# Altium PCB FOS 00_01 Rev 1_6.PcbDoc
Units mm, origin at the board's own origin, x right, y up, seen from the top; angles counter-clockwise.
Board outline 194.8 x 15.3 mm, 2 copper layers (Top Layer, Bottom Layer), stack 1.571 mm thick; 34 components, 28 nets, 97 pads, 17 vias.
Unrouted connection lines stored in the file: 1.
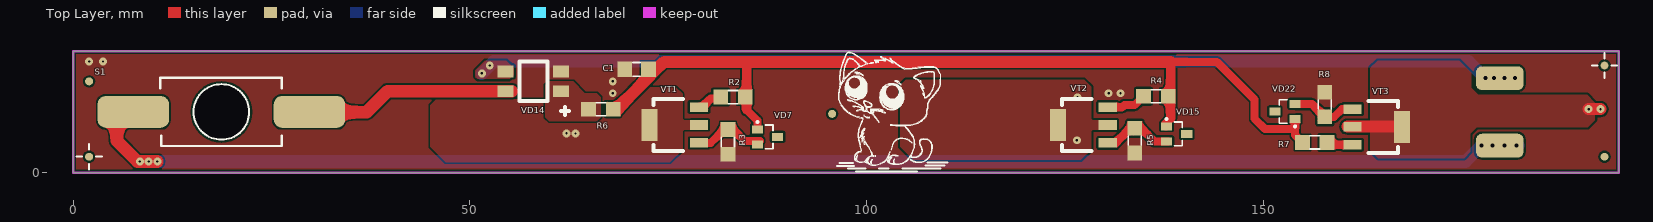
[diagram p0: Top Layer view]
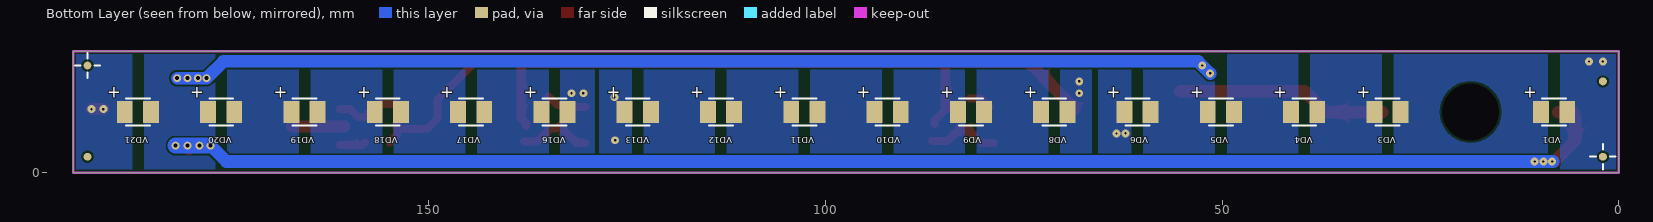
[diagram p1: Bottom Layer view, seen from below]
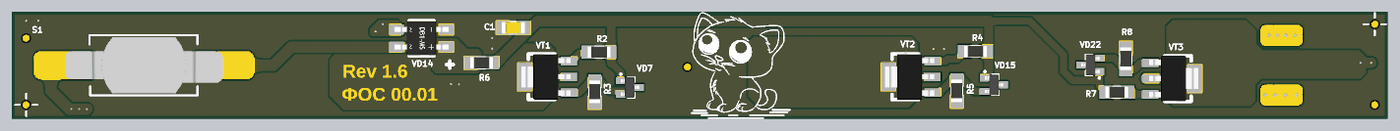
[diagram p2: 3D render of the assembled board from above, using the file's embedded part models]
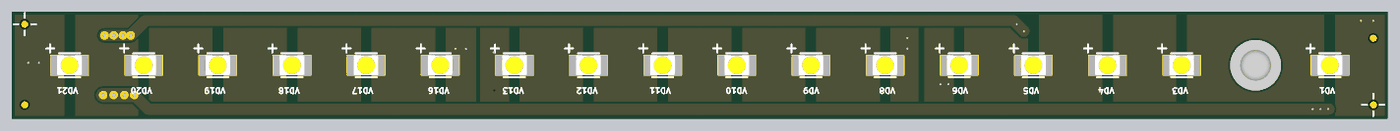
[diagram p3: 3D render of the assembled board from below, using the file's embedded part models]

## Layer stack, top to bottom
Top Solder: solder mask 0.0102, Solder Resist, Dk 3.5
Top Layer: signal copper 0.0356
Dielectric 1: dielectric 1.5, FR-4, Dk 4.8
Bottom Layer: signal copper 0.0356
Bottom Solder: solder mask 0.0102, Solder Resist, Dk 3.5

## Board outline
0,0 194.8,0 194.8,15.3 0,15.3

## Design rules (kind name [scope] priority, off if disabled: settings)
Clearance [All] p1: gap=0.254 ignorepadtopadclearanceinfootprint=FALSE // 0.5
PolygonConnect [All] p1: connectstyle=Direct reliefconductorwidth=0.254 reliefentries=4 polygonreliefangle="90 Angle" airgapwidth=0.254
RoutingVias [All] p1: holewidth=0.711 width=1.27 viastyle="Through Hole" minholewidth=0.711 minwidth=1.27 maxholewidth=0.711 maxwidth=1.27
SolderMaskExpansion [All] p1: expansion=0.102
Width [All] p1: maxlimit=10 minlimit=0.254 preferedwidth=1
30 further rules are at their usual default settings.

## Components (designator, comment, footprint, x,y, rotation, side; value= is the part's Value field where it differs from the comment)
C1 "Capacitor" CAP1206 71,13 r0 top value="1 uF"
R2 "Resistor" RES1206 83.15,9.525 r0 top value="20 Om"
R3 "Resistor" RES1206 82.525,3.875 r90 top value="10 kOm"
R4 "Resistor" RES1206 136.45,9.625 r0 top value="20 Om"
R5 "Resistor" RES1206 133.8,4.025 r90 top value="10 kOm"
R6 "Resistor" RES1206 66.5,8 r180 top value="33 Om"
R7 "Resistor" RES1206 156.475,3.8 r180 top value="20 Om"
R8 "Resistor" RES1206 157.75,8.575 r270 top value="10 kOm"
S1 "button" BUTTON1_2 18.675,7.65 r180 top
VD1 "LED" LED_SAKURA 8.15,7.65 r180 bottom
VD3 "LED" LED_SAKURA 29.15,7.65 r180 bottom
VD4 "LED" LED_SAKURA 39.65,7.65 r180 bottom
VD5 "LED" LED_SAKURA 50.15,7.65 r180 bottom
VD6 "LED" LED_SAKURA 60.65,7.65 r180 bottom
VD7 "BAV23S" "SOT 23" 87.5,4.5 r0 top
VD8 "LED" LED_SAKURA 71.15,7.65 r180 bottom
VD9 "LED" LED_SAKURA 81.65,7.65 r180 bottom
VD10 "LED" LED_SAKURA 92.15,7.65 r180 bottom
VD11 "LED" LED_SAKURA 102.65,7.65 r180 bottom
VD12 "LED" LED_SAKURA 113.15,7.65 r180 bottom
VD13 "LED" LED_SAKURA 123.65,7.65 r180 bottom
VD14 "Diode Bridge" DB-1MS 58,11.5 r270 top value=B1S
VD15 "BAV23S" "SOT 23" 139.075,4.875 r0 top
VD16 "LED" LED_SAKURA 134.15,7.65 r180 bottom
VD17 "LED" LED_SAKURA 144.65,7.65 r180 bottom
VD18 "LED" LED_SAKURA 155.15,7.65 r180 bottom
VD19 "LED" LED_SAKURA 165.65,7.65 r180 bottom
VD20 "LED" LED_SAKURA 176.15,7.65 r180 bottom
VD21 "LED" LED_SAKURA 186.65,7.65 r180 bottom
VD22 "BAV23S" "SOT 23" 152.725,7.7 r180 top
VT1 "PNP" SOT223 75.625,6 r90 top value=BCP53
VT2 "PNP" SOT223 127.125,6 r90 top value=BCP53
VT3 "PNP" SOT223 164.5,5.75 r270 top value=BCP53
? "Comment" cat 102.625,8.9 r0 top

## Footprints (in the part's own frame and the unit in brackets; to place one, negate y for a bottom-side part, rotate by r counter-clockwise, add the part's x,y. Pads: shape width x height; smd on the part's side, far side on the other; paste and mask are expansions set on the pad)
BUTTON1_2 [mm]
  round 0 hole 7.2: 0(0,0)
  rrect50% 9x4 smd paste-4: 1(-11.1,0) 2(11.1,0)
  silkscreen extent -7.6,-4.3 7.7,4.3, body extent -11.2,-4 11.2,4, height 4
CAP1206 [mm]
  rect 1.85x1.95 smd: 1(-1.5,0) 2(1.5,0)
  silkscreen extent -0.45,-0.87 0.45,0.87, body extent -1.65,-0.85 1.65,0.85, height 1.5
cat [mm]
  silkscreen extent -6.36,-8.78 7.55,6.25
DB-1MS [mm]
  rect 1.5x2 smd: 1(1.25,3.5) 2(-1.25,3.5) 3(-1.25,-3.5) 4(1.25,-3.5)
  silkscreen extent -2.5,-1.75 4.25,4.5, body extent -2.45,-3.8 2.45,3.8, height 2.9
LED_SAKURA [mm]
  rect 2x2.8 smd: 1(1.651,0) 2(-1.651,0)
  silkscreen extent -1.5,-1.7 1.5,1.7, body extent -1.78,-1.4 1.78,1.4, height 0.7
RES1206 [mm] "Chip Resistor, 2-Leads, Body 3,20x1,60mm, IPC Medium Density"
  rect 1.85x1.85 smd: 1(-1.55,0) 2(1.55,0)
  silkscreen extent -0.6,-0.82 0.6,0.82, body extent -1.6,-0.8 1.6,0.8, height 0.6
SOT223 [mm]
  rect 1.2x2.3 smd: 1(-2.25,-3.25) 2(0,-3.25) 3(2.25,-3.25)
  rect 4x2 smd: 4(0,3)
  silkscreen extent -3.25,-1.25 3.25,2.5, body extent -3.25,-3.48 3.25,3.48, height 1.7
"SOT 23" [mm] "SOT23, 3-Leads, Body 2,90x2,45mm, Pitch 0,95mm, IPC Medium Density"
  rect 1.4x1 smd: 1(-1.275,0.95) 2(-1.275,-0.95) 3(1.275,0)
  silkscreen extent -1.4,-1.5 0.7,2, body extent -1.3,-1.5 1.3,1.5, height 1.1

## Free pads (board coordinates)
  rrect50% 6x3 smd paste-3: 1(179.8,3.4)
  rrect50% 6x3 smd paste-3 mask+0.102: 1(179.8,11.9)
  round 1 smd paste-3 mask+0.2: 2(2,2) 2(2,11.5) 2(95.65,7.4) 2(193,2) 2(193,13.5)
  round 1 smd far side paste-3 mask+0.2: 2(2,2) 2(2,11.5) 2(193,2) 2(193,13.5)
  round 1 hole 0.5: 3(177.5,3.4) 3(178,11.9) 3(178.9,3.4) 3(179.1,11.9) 3(180.4,3.4) 3(180.4,11.9) 3(181.7,11.9) 3(181.9,3.4)

## Via types
v1: diameter 1, hole 0.3, Top Layer to Bottom Layer, tented both sides, 17 vias

## Nets (pads, with @x,y where several pads share a name; then routed paths per layer and width w, separated by ;. In a path a pad name is that pad's centre, name@x,y a point inside that pad or via, vN(x,y) a via of type N, cw(c..) or ccw(c..) an arc to the next point about the centre after c; other vN are vias at no path point)
GND: C1.1 R3.1 R5.1 R8.1 VD1.1 VD8.1 VD14.2 VD16.1
  other v1: 68,10 130.5,10 132,10 68,11.5 2,14 3.75,14
NetC1_2: C1.2 R2.2 R4.2 R6.1 R7.2 VD7.1 VD15.1 VD22.1 | length 112.9
  Top Layer w1: 84.875,7.925 86.225,6.575 86.225,6.15 ; VD15.1@137.725,5.825 137.725,6.275 138.325,6.875 ; 138.325,13.95 144.15,13.95 148.9,9.2 148.9,6.8 150.2,5.5 154,5.5 ; VD22.1 154,5.5 ; R7.2 154,4.725 154,5.5
  Top Layer w1.2: 84.875,7.925 84.875,13.9 ; 138.325,6.875 138.325,13.95
  Top Layer w1.5: R6.1@68.5,8 74.45,13.95 138.325,13.95
NetR2_1: R2.1 VT1.3 | length 3
  Top Layer w1: VT1.3@79.275,8.275 80.35,9.35 R2.1@81.825,9.35
NetR3_2: R3.2 VD7.2 VT1.1 | length 9.1
  Top Layer w1: VT1.1@78.75,3.75 VT1.1 80.35,3.75 82.025,5.425 R3.2 83.175,5.425 84.6,4 VD7.2@86.55,4
NetR4_1: R4.1 VT2.3 | length 5.2
  Top Layer w1: VT2.3@130.25,8.25 VT2.3 132.25,8.25 132.5,8.5 133.775,8.5 R4.1
NetR5_2: R5.2 VD15.2 VT2.1 | length 9.4
  Top Layer w1: VT2.1@130.25,3.75 VT2.1 131.35,3.75 133.487,5.887 R5.2 134.625,5.575 136.275,3.925 VD15.2 VD15.2@138,3.925
NetR6_2: R6.2 VD14.1
NetR7_1: R7.1 VT3.3 | length 3.3
  Top Layer w1: R7.1 158.325,3.5 VT3.3
NetR8_2: R8.2 VD22.2 VT3.1 | length 8.3
  Top Layer w1: VD22.2 156.125,8.65 R8.2 158.925,7.025 159.9,8 VT3.1
NetVD1_2: VD1.2 VD3.1
NetVD3_2: VD3.2 VD4.1
NetVD4_2: VD4.2 VD5.1
NetVD5_2: VD5.2 VD6.1
NetVD6_2: VD6.2 VT1.2 VT1.4
  other v1: 63.3,4.925 62.175,4.95
NetVD8_2: VD8.2 VD9.1
NetVD9_2: VD9.2 VD10.1
NetVD10_2: VD10.2 VD11.1
NetVD11_2: VD11.2 VD12.1
NetVD12_2: VD12.2 VD13.1
NetVD13_2: VD13.2 VT2.2 VT2.4
  other v1: 126.5,4.075 126.575,9.5
NetVD16_2: VD16.2 VD17.1
NetVD17_2: VD17.2 VD18.1
NetVD18_2: VD18.2 VD19.1
NetVD19_2: VD19.2 VD20.1
NetVD20_2: VD20.2 VD21.1
NetVD21_2: VD21.2 VT3.2 VT3.4 | length 8.1
  Top Layer w1.5: VT3.2@160.6,5.8 VT3.4@167.2,5.8 ; v1(191,8) v1(192.5,8)
POWER1: pad.1@179.8,11.9 pad.3@178,11.9 pad.3@179.1,11.9 pad.3@180.4,11.9 pad.3@181.7,11.9 VD14.3 | length 131.7
  Bottom Layer w1.6: v1(51.5,12.5) 53.025,14.025 175.875,14.025 178,11.9 179.1,11.9 180.4,11.9 pad.3@181.7,11.9
  other v1: 52.5,13.5
POWER2: pad.1@179.8,3.4 pad.3@177.5,3.4 pad.3@178.9,3.4 pad.3@180.4,3.4 pad.3@181.9,3.4 S1.1 S1.2 VD14.4 | length 214.4
  Top Layer w1.6: S1.2@5.5,7 5.5,4 8.1,1.4 v1(8.4,1.4) v1(9.5,1.4) v1(10.6,1.4) ; S1.2@5.7,7.625 S1.2@7.6,7.625 ; S1.1@29.8,7.625 37,7.625 39.625,10.25 VD14.4 VD14.4@55.275,10.25 ; pad.1@178,3.4 178.9,3.4 179.8,3.4 pad.1@180.2,3
  Bottom Layer w1.6: v1@8.3,1.404 175.504,1.404 177.5,3.4 pad.3@177.7,3.4
  Bottom Layer w2: pad.3@177.7,3.4 178.9,3.4 180.4,3.4 pad.3@181.9,3.4
pads on no net: S1.0 VD7.3 VD15.3 VD22.3

## Polygon pours and split planes (outlines as drawn)
NetVD20_2 on Bottom Layer "Bottom Layer-No Net 1" (solid, remove dead copper, pour order 38): 176.925,15.3 185.875,15.3 185.875,0 176.925,0
NetVD19_2 on Bottom Layer "Bottom Layer-No Net 1" (solid, remove dead copper, pour order 36): 166.375,15.3 175.4,15.3 175.4,0 166.375,0
NetVD18_2 on Bottom Layer "Bottom Layer-No Net 1" (solid, remove dead copper, pour order 34): 155.875,15.3 164.875,15.3 164.875,0 155.875,0
NetVD17_2 on Bottom Layer "Bottom Layer-No Net 1" (solid, remove dead copper, pour order 32): 145.4,15.3 154.375,15.3 154.375,0 145.4,0
NetVD16_2 on Bottom Layer "Bottom Layer-No Net 1" (solid, remove dead copper, pour order 30): 134.875,15.3 143.9,15.3 143.9,0 134.875,0
GND on Bottom Layer "Bottom Layer-No Net 1" (solid, remove dead copper, pour order 28): 129.075,15.3 133.4,15.3 133.4,0 129.075,0
NetVD13_2 on Bottom Layer "Bottom Layer-No Net 1" (solid, remove dead copper, pour order 26): 124.4,15.3 128.5,15.3 128.5,0 124.4,0
NetVD12_2 on Bottom Layer "Bottom Layer-No Net 1" (solid, remove dead copper, pour order 24): 113.925,15.3 122.9,15.3 122.9,0 113.925,0
NetVD11_2 on Bottom Layer "Bottom Layer-No Net 1" (solid, remove dead copper, pour order 22): 103.4,15.3 112.4,15.3 112.4,0 103.4,0
NetVD10_2 on Bottom Layer "Bottom Layer-No Net 1" (solid, remove dead copper, pour order 20): 92.9,15.3 101.9,15.3 101.9,0 92.9,0
NetVD9_2 on Bottom Layer "Bottom Layer-No Net 1" (solid, remove dead copper, pour order 18): 82.425,15.3 91.375,15.3 91.375,0 82.425,0
NetVD8_2 on Bottom Layer "Bottom Layer-No Net 1" (solid, remove dead copper, pour order 16): 71.9,15.3 80.9,15.3 80.9,0 71.9,0
GND on Bottom Layer "Bottom Layer-No Net 1" (solid, remove dead copper, pour order 14): 70.4,15.3 66.4,15.3 66.4,0 70.4,0
NetVD6_2 on Bottom Layer "Bottom Layer-No Net 1" (solid, remove dead copper, pour order 12): 61.425,15.3 65.6,15.3 65.6,0 61.425,0
NetVD5_2 on Bottom Layer "Bottom Layer-No Net 1" (solid, remove dead copper, pour order 10): 50.925,15.301 59.925,15.301 59.925,0.001 50.925,0.001
NetVD4_2 on Bottom Layer "Bottom Layer-No Net 1" (solid, remove dead copper, pour order 8): 40.4,15.301 49.375,15.301 49.375,0.001 40.4,0.001
NetVD3_2 on Bottom Layer "Bottom Layer-No Net 1" (solid, remove dead copper, pour order 6): 29.9,15.3 38.875,15.3 38.875,0 29.9,0
NetVD1_2 on Bottom Layer "Bottom Layer-No Net 1" (solid, remove dead copper, pour order 2): 8.925,15.3 28.375,15.3 28.375,0 8.925,0
GND on Bottom Layer "Bottom Layer-No Net 1" (solid, remove dead copper, pour order 0): 7.4,15.3 0,15.3 0,0 7.4,0
NetVD21_2 on Bottom Layer "Bottom Layer-No Net 1" (solid, remove dead copper, pour order 40): 187.375,15.3 194.8,15.3 194.8,0 187.375,0
NetVD21_2 on Top Layer "Bottom Layer-No Net 1" (solid, remove dead copper, pour order 70): 163.5,13.2 164.4,14.1 174.7,14.1 176.2,12.6 176.2,10.7 177.1,9.8 190.8,9.8 191.8,8.8 191.8,6.6 190.9,5.7 176.9,5.7 176.1,4.9 176.1,2.6 175.3,1.8 164.5,1.8 163.5,2.8
GND on Top Layer "Bottom Layer-No Net 1" (solid, remove dead copper, pour order 68): 0,0 0,15.303 194.8,15.303 194.8,0
NetVD6_2 on Top Layer "Bottom Layer-No Net 1" (solid, remove dead copper, pour order 66): 68.1,1.3 46.95,1.3 45,3.25 45,8.5 45.75,9.25 68.1,9.25
NetVD6_2 on Top Layer "Bottom Layer-No Net 1" (solid, remove dead copper, pour order 58): 67.425,6.158 72.034,10.775 75.95,10.775 76.8,9.925 76.8,6.8 77,6.6 77.8,6.6 77.8,5.4 77,5.4 76.8,5.2 76.8,2.9 75.2,1.3 68.1,1.3 67.425,1.975
NetVD13_2 on Top Layer "Bottom Layer-No Net 1" (solid, remove dead copper, pour order 60): 104.25,11.001 104.948,11.7 127.4,11.7 128.3,10.8 128.3,6.8 128.5,6.6 129.3,6.6 129.3,5.4 128.5,5.4 128.3,5.2 128.3,2.9 127,1.6 105.9,1.6 104.25,3.25
POWER1 on Top Layer "Bottom Layer-No Net 1" (solid, remove dead copper, pour order 54): 55.5,13.2 54.6,14.1 51.9,14.1 50.7,12.9 50.7,12 50.9,11.8 55,11.8 55.5,12.3
NetR6_2 on Top Layer "Bottom Layer-No Net 1" (solid, remove dead copper, pour order 42): 60,11.5 63,11.5 64.5,10 66,10 66.5,9.5 66.5,7 66,6.5 60,6.5 59.5,7 59.5,11

## Keep-outs
Keep-Out Layer:
  the board outline again, w0.3

## Silkscreen, mask and mechanical layers (free items; w line width, h text height)
Top Overlay:
  rectangle: 98,9.784 99.042,10.475
  rectangle: 98.767,9.782 99.872,10.644
  rectangle: 102.375,8.545 103.091,9.2
  rectangle: 103.423,8.445 104.375,9.275
  rectangle: 103.595,8.365 104.233,8.496
  lines w0.254: 0.4,2 1.1,2 ; 2,0.4 2,1.1 ; 2,2.9 2,3.6 ; 2.9,2 3.6,2 ; 191.4,13.5 192.1,13.5 ; 193,11.9 193,12.6 ; 193,14.4 193,15.1 ; 193.9,13.5 194.6,13.5
Bottom Overlay:
  lines w0.254: 0.4,2 1.1,2 ; 2,0.4 2,1.1 ; 2,2.9 2,3.6 ; 2.9,2 3.6,2 ; 191.4,13.5 192.1,13.5 ; 193,11.9 193,12.6 ; 193,14.4 193,15.1 ; 193.9,13.5 194.6,13.5
Top Solder:
  text "Rev 1.6" at 46.8,5.9 h3
  text "ФОС 00.01" at 46.7,2.6 h3
Mechanical 3:
  circle w0.254: c18.675,7.65 r3.6
Mechanical 4:
  lines w0.05: -0.225,7.65 3.375,7.65 194.975,7.65 ; 8.15,5.925 8.15,9.375 ; 18.65,5.925 18.65,9.375 ; 29.15,5.925 29.15,9.375 ; 39.65,5.925 39.65,9.375 ; 50.15,5.925 50.15,9.375 ; 60.65,5.925 60.65,9.375 ; 71.15,5.925 71.15,9.375 ; 81.65,5.925 81.65,9.375 ; 92.15,5.925 92.15,9.375 ; 102.65,5.925 102.65,9.375 ; 113.15,5.925 113.15,9.375 ; 123.65,5.925 123.65,9.375 ; 134.15,5.925 134.15,9.375 ; 144.65,5.925 144.65,9.375 ; 155.15,5.925 155.15,9.375 ; 165.65,5.925 165.65,9.375 ; 176.15,5.925 176.15,9.375 ; 186.65,5.925 186.65,9.375

## Text inside footprints (layer, text, board x,y; h text height)
VD1: Bottom Overlay "+" at 12.025,9.45 h1.52
VD3: Bottom Overlay "+" at 33.025,9.45 h1.52
VD4: Bottom Overlay "+" at 43.525,9.45 h1.52
VD5: Bottom Overlay "+" at 54.025,9.45 h1.52
VD6: Bottom Overlay "+" at 64.525,9.45 h1.52
VD8: Bottom Overlay "+" at 75.025,9.45 h1.52
VD9: Bottom Overlay "+" at 85.525,9.45 h1.52
VD10: Bottom Overlay "+" at 96.025,9.45 h1.52
VD11: Bottom Overlay "+" at 106.525,9.45 h1.52
VD12: Bottom Overlay "+" at 117.025,9.45 h1.52
VD13: Bottom Overlay "+" at 127.525,9.45 h1.52
VD16: Bottom Overlay "+" at 138.025,9.45 h1.52
VD17: Bottom Overlay "+" at 148.525,9.45 h1.52
VD18: Bottom Overlay "+" at 159.025,9.45 h1.52
VD19: Bottom Overlay "+" at 169.525,9.45 h1.52
VD20: Bottom Overlay "+" at 180.025,9.45 h1.52
VD21: Bottom Overlay "+" at 190.525,9.45 h1.52